# Allegro board FLASHLIGHT_REVA2-19.brd
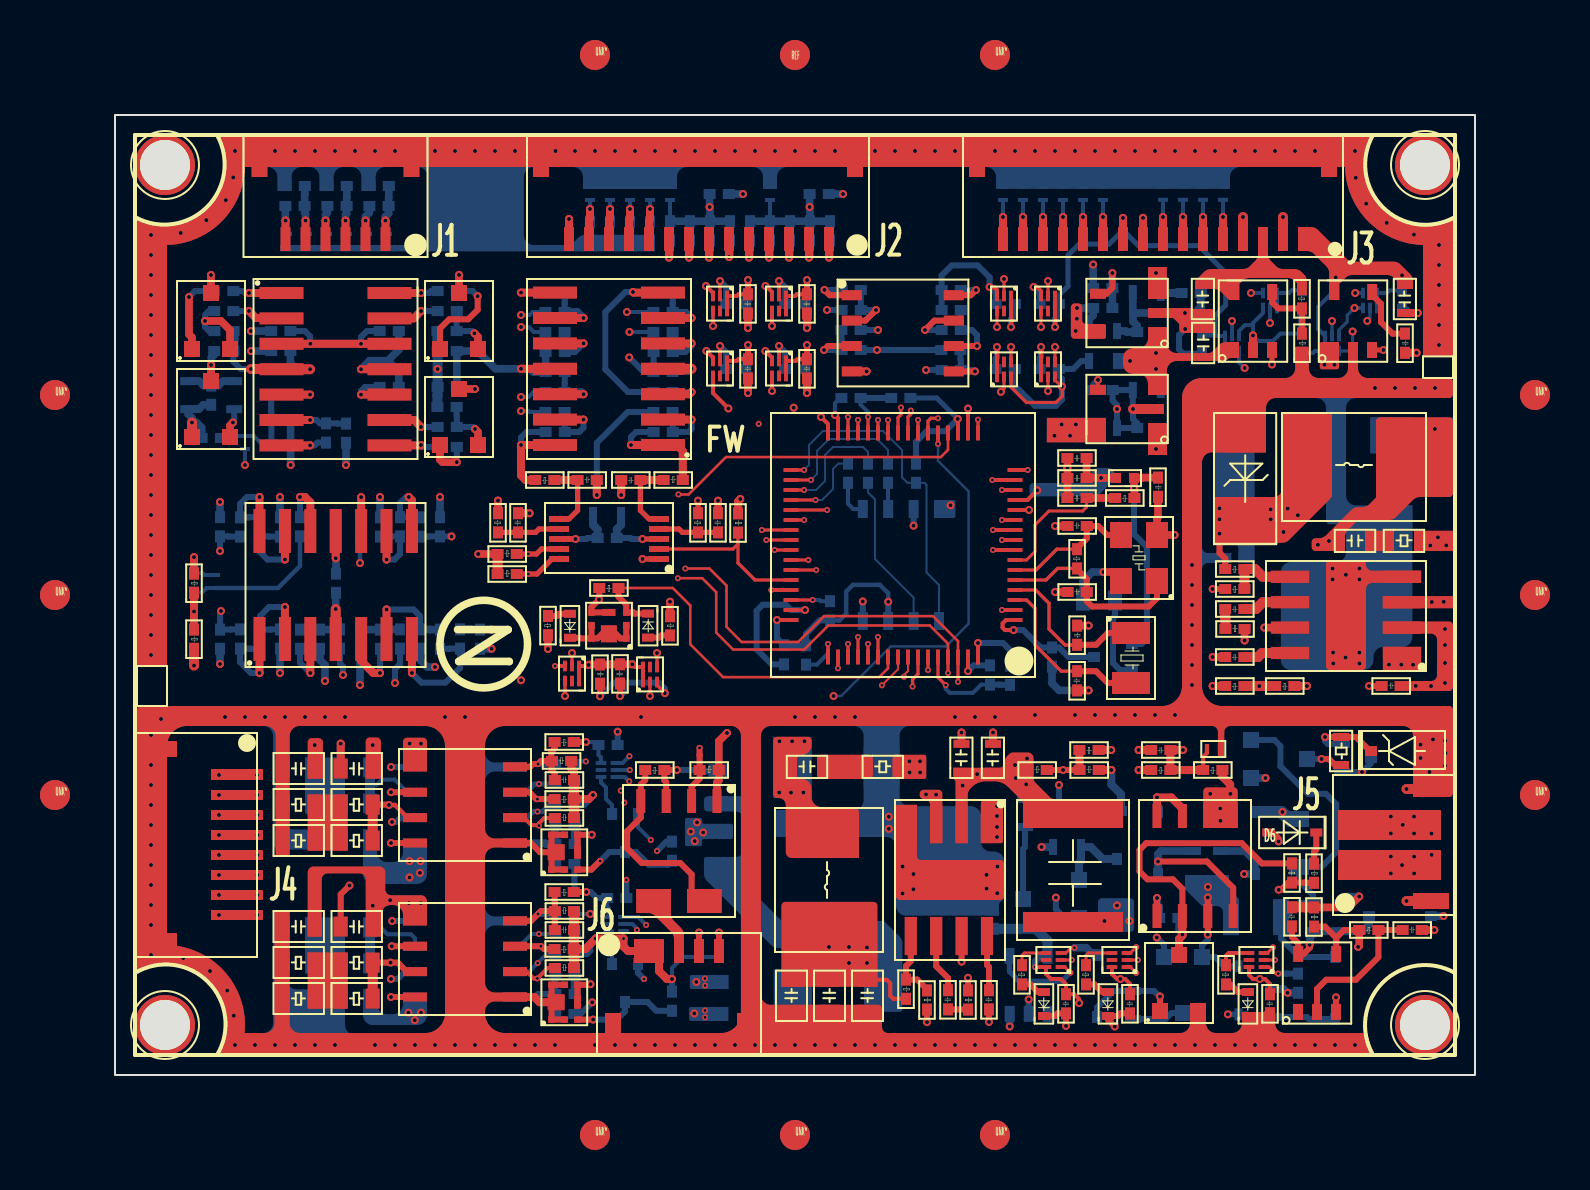
[diagram p0: board, top side]
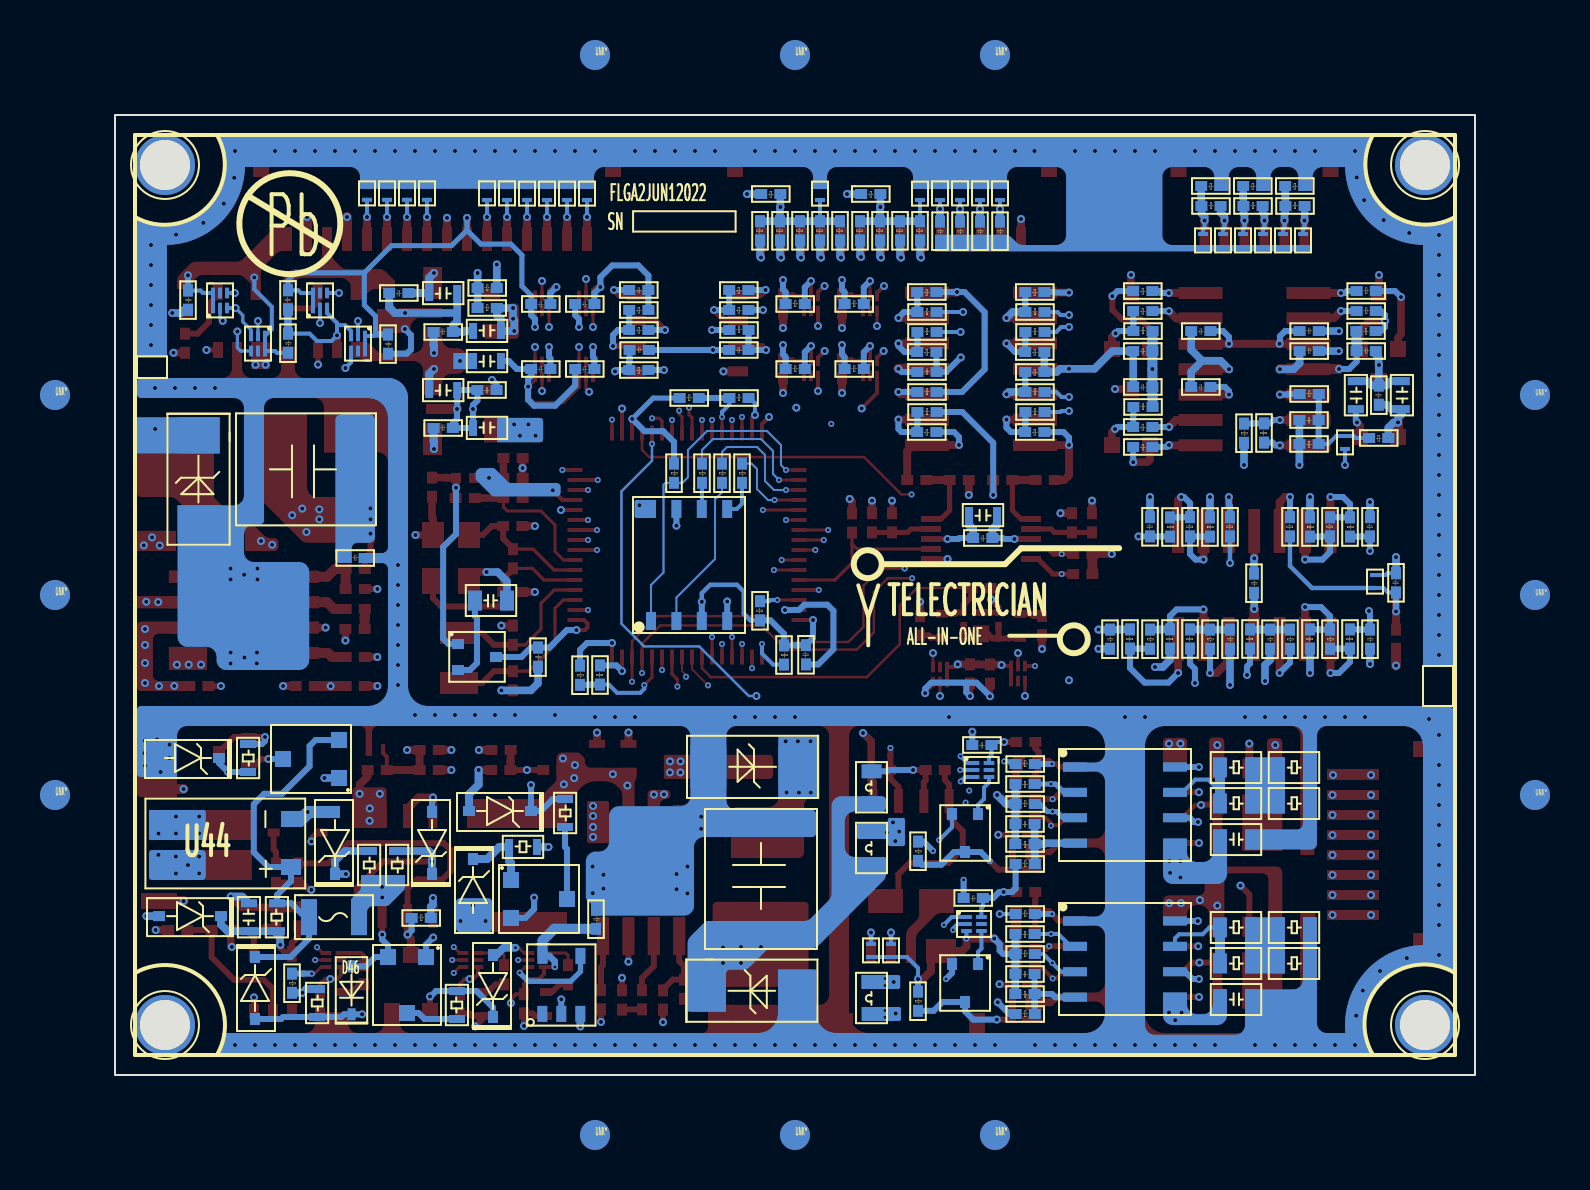
[diagram p1: board, bottom side, seen from below]

Outline 68 x 48 mm; copper layers: TOP, GND-2, SIGNAL-3, VCC-4, GND-5, SIGNAL-6, GND-7, BOTTOM. Coordinates in mm from the lower left corner of the outline.
Outline path: rectangle 0,0 68,48

## Design rules (mm)
constraint set DEFAULT: min track width 0.1

## Placement (name value [footprint] x y rotation side)
BT1  CR1220-3V  [C0805]  50.2 23.1 180 bottom
C1  10uF  [C0603]  54.8 38 90 top
C2  10uF  [C0603]  64.9 38 90 top
C3  0.1uF  [C0402]  31.4 39.05 270 top
C4  0.1uF  [C0402]  34.35 39.05 270 top
C5  4.7uF  [C0603]  54 37.4 270 top
C6  0.1uF  [C0402]  64.75 36.1 90 top
C7  0.1uF  [C0402]  31.4 35.8 270 top
C8  0.1uF  [C0402]  34.35 35.8 270 top
C9  10uF  [C0402]  47.61 30.6 0 top
C10  0.1uF  [C0402]  47.61 29.6 0 top
C11  0.1uF  [C0402]  24.1 30 180 top
C12  0.1uF  [C0402]  25.3 29.5 0 top
C13  0.1uF  [C0402]  52.4 28.9 90 top
C14  0.1uF  [C0402]  47.61 28.6 0 top
C15  0.1uF  [C0402]  19.9 28.1 270 top
C16  0.1uF  [C0402]  29.9 28.1 270 top
C17  22pF  [C0402]  48.6 27.7 180 top
C18  10nF  [C0603]  61.2 26.3 0 top
C19  22pF  [C0402]  48.6 24.4 180 top
C20  5.6nF  [C0402]  55.5 23.05 0 top
C21  22pF  [C0402]  48.35 21.5 90 top
C22  0.1uF  [C0402]  55.5 20.65 0 top
C23  0.1uF  [C0402]  24.5 19.55 90 top
C24  0.1uF  [C0402]  25 20.55 270 top
C25  22pF  [C0402]  47.85 20.2 270 top
C26  0.1uF  [C0402]  64.3 19.7 180 top
C27  0.1uF  [C0402]  51.8 16 0 top
C28  0.1uF  [C0603]  42.73 15.06 90 top
C29  0.1uF  [C0603]  44.3 15.06 90 top
C30  10nF  [C0603]  33.8 15 0 top
C31  10uF  [C0805]  8.19 14.7 0 top
C32  10uF  [C0805]  11.09 14.7 0 top
C33  0.1uF  [C0402]  22.96 15 180 top
C34  47uF  [C2220]  47.9 7.65 90 top
C35  0.1uF  [C0402]  58.6 8.4 270 top
C36  10uF  [C0805]  8.19 6.8 0 top
C37  10uF  [C0805]  11.09 6.8 0 top
C38  0.1uF  [C0402]  22.96 7.5 180 top
C39  1.5uF  [C0402]  65.35 7.5 180 top
C40  10uF  [C0805]  33.2 4.96 270 top
C41  10uF  [C0805]  35.1 4.96 270 top
C42  10uF  [C0805]  37 4.96 270 top
C43  5.6nF  [C0402]  41.4 4.25 270 top
C44  0.1uF  [C0402]  43.45 4.25 270 top
C45  0.1uF  [C0402]  47.3 4.05 270 top
C46  0.1uF  [C0402]  50.5 4.05 270 top
C47  0.1uF  [C0402]  57.5 4.05 270 top
C48  0.1uF  [C0402]  26.5 41.7 90 bottom
C49  0.1uF  [C0402]  25.5 41.7 90 bottom
C50  0.1uF  [C0402]  24.5 41.7 90 bottom
C51  0.1uF  [C0402]  23.5 41.7 90 bottom
C52  0.1uF  [C0402]  42.3 39 180 bottom
C53  0.1uF  [C0402]  54.3 38.85 180 bottom
C54  4.7uF  [C0603]  50.79 39.5 0 bottom
C55  0.1uF  [C0402]  64.1 38.26 90 bottom
C56  0.1uF  [C0402]  59.6 39.24 270 bottom
C57  0.1uF  [C0402]  47.2 38.3 180 bottom
C58  0.1uF  [C0402]  45 38.3 180 bottom
C59  10uF  [C0603]  50.2 36.8 180 bottom
C60  0.1uF  [C0402]  14.2 36.95 180 bottom
C61  0.1uF  [C0402]  7.8 37.45 0 bottom
C62  0.1uF  [C0402]  51.1 37.4 0 bottom
C63  0.1uF  [C0402]  59.1 36.1 90 bottom
C64  0.1uF  [C0402]  54.1 36.05 90 bottom
C65  0.1uF  [C0402]  41.3 36.5 0 bottom
C66  0.1uF  [C0402]  37.3 36 180 bottom
C67  10uF  [C0402]  17.1 35.95 180 bottom
C68  0.1uF  [C0402]  7.8 36.45 0 bottom
C69  10uF  [C0402]  4.95 36.45 0 bottom
C70  4.7uF  [C0603]  48.6 36.1 0 bottom
C71  0.1uF  [C0402]  47.2 35.05 180 bottom
C72  0.1uF  [C0402]  45 35.05 180 bottom
C73  0.1uF  [C0402]  26.91 35.4 0 bottom
C74  10uF  [C0402]  17.1 34.15 180 bottom
C75  0.1uF  [C0402]  14.2 34.15 180 bottom
C76  4.7uF  [C0603]  50.79 34.65 0 bottom
C77  0.1uF  [C0402]  49.89 34 180 bottom
C78  10uF  [C0603]  6.36 34.79 270 bottom
C79  0.1uF  [C0402]  5.06 34.48 270 bottom
C80  10uF  [C0603]  4.06 34.79 270 bottom
C81  0.1uF  [C0402]  8.79 32.5 180 bottom
C82  0.1uF  [C0402]  51.1 32.6 0 bottom
C83  10uF  [C0603]  50.2 31.95 180 bottom
C84  47uF  [C2220]  61.05 30.29 180 bottom
C85  10uF  [C0603]  23.8 28.4 0 bottom
C86  0.1uF  [C0402]  16.5 27.9 270 bottom
C87  0.1uF  [C0402]  5.5 27.9 270 bottom
C88  0.1uF  [C0402]  25.1 26.6 180 bottom
C89  0.1uF  [C0402]  55.5 26.1 0 bottom
C90  0.1uF  [C0402]  4.2 25.1 270 bottom
C91  0.1uF  [C0402]  10.8 24.1 90 bottom
C92  0.1uF  [C0402]  18 21.3 90 bottom
C93  0.1uF  [C0402]  12 21.3 90 bottom
C94  0.1uF  [C0402]  10 21.3 90 bottom
C95  0.1uF  [C0402]  5 21.3 90 bottom
C96  0.1uF  [C0402]  33.7 21.5 270 bottom
C97  0.1uF  [C0402]  46.6 20.41 90 bottom
C98  0.1uF  [C0402]  25.14 16.25 180 bottom
C99  0.1uF  [C0402]  22.99 12.3 180 bottom
C100  10uF  [C0805]  10.95 12.4 0 bottom
C101  47uF  [C2220]  35.7 12.4 270 bottom
C102  0.1uF  [C0402]  25.58 8.6 180 bottom
C103  10uF  [C0603]  60.9 7.09 90 bottom
C104  0.1uF  [C0402]  43.7 7.3 90 bottom
C105  0.1uF  [C0402]  22.99 4.8 180 bottom
C106  10uF  [C0805]  10.95 4.4 0 bottom
D1  SMAJ6.0A  [DO-214AC]  57.9 27.5 90 top
D2  BLUE  [LED0402]  23 21.96 90 top
D3  BLUE  [LED0402]  26.4 22.97 270 top
D4  ESD4.5V88D-C  [DFN-1006DN]  55.24 16.3 180 top
D5  BZT52C6V8  [SOD-123]  62.8 16.2 0 top
D6  MBRX0560  [SOD-323]  60.3 12.8 180 top
D7  BLUE  [LED0402]  46.7 3.05 90 top
D8  RED  [LED0402]  49.9 3.05 90 top
D9  YELLOW  [LED0402]  56.9 3.05 90 top
D10  ESD4.5V88D-C  [DFN-1006DN]  49.4 43.75 90 bottom
D11  ESD4.5V88D-C  [DFN-1006DN]  48.4 43.75 90 bottom
D12  ESD4.5V88D-C  [DFN-1006DN]  26.75 43.75 90 bottom
D13  ESD4.5V88D-C  [DFN-1006DN]  25.75 43.75 90 bottom
D14  ESD4.5V88D-C  [DFN-1006DN]  24.75 43.75 90 bottom
D15  ESD4.5V88D-C  [DFN-1006DN]  23.75 43.75 90 bottom
D16  ESD4.5V88D-C  [DFN-1006DN]  55.4 44.41 270 bottom
D17  ESD4.5V88D-C  [DFN-1006DN]  54.4 44.41 270 bottom
D18  ESD4.5V88D-C  [DFN-1006DN]  53.4 44.41 270 bottom
D19  ESD4.5V88D-C  [DFN-1006DN]  52.4 44.41 270 bottom
D20  ESD4.5V88D-C  [DFN-1006DN]  47.4 44.4 270 bottom
D21  ESD4.5V88D-C  [DFN-1006DN]  46.4 44.4 270 bottom
D22  ESD4.5V88D-C  [DFN-1006DN]  45.4 44.4 270 bottom
D23  ESD4.5V88D-C  [DFN-1006DN]  44.4 44.4 270 bottom
D24  ESD4.5V88D-C  [DFN-1006DN]  32.75 44.4 270 bottom
D25  ESD4.5V88D-C  [DFN-1006DN]  27.75 44.4 270 bottom
D26  ESD4.5V88D-C  [DFN-1006DN]  13.6 41.4 90 bottom
D27  ESD4.5V88D-C  [DFN-1006DN]  12.6 41.4 90 bottom
D28  ESD4.5V88D-C  [DFN-1006DN]  11.6 41.4 90 bottom
D29  ESD4.5V88D-C  [DFN-1006DN]  10.6 41.4 90 bottom
D30  ESD4.5V88D-C  [DFN-1006DN]  9.6 41.4 90 bottom
D31  ESD4.5V88D-C  [DFN-1006DN]  8.6 41.4 90 bottom
D32  ESD4.5V88D-C  [DFN-1006DN]  6.5 31.3 90 bottom
D33  SS35  [DO-214AC]  65.22 32.11 270 bottom
D34  ESD4.5V88D-C  [DFN-1006DN]  5 25 270 bottom
D35  BZT52C4V7  [SOD-123]  62.8 15.85 0 bottom
D36  SS35  [DO-214AC]  33.8 16.8 0 bottom
D37  BZT52C4V7  [SOD-123]  47.2 13.2 0 bottom
D38  BZT52C36V  [SOD-123]  57 10.05 90 bottom
D39  BZT52C24  [SOD-123]  52.15 10.05 90 bottom
D40  BZT52C24  [SOD-123]  50.1 10.8 270 bottom
D41  BZT52C4V7  [SOD-123]  62.7 7.95 0 bottom
D42  ESD4.5V88D-C  [DFN-1006DN]  30.2 5.9 90 bottom
D43  ESD4.5V88D-C  [DFN-1006DN]  29.2 5.9 90 bottom
D44  BZT52C4V7  [SOD-123]  49.1 2.9 90 bottom
D45  BZT52C4V7  [SOD-123]  61 5.9 270 bottom
D46  MBRX0560  [SOD-323]  55.5 2.8 90 bottom
D47  SMAJ13A  [DO-214AC]  38.48 2.82 180 bottom
F1  1AMP  [FUSE1206]  58.3 7.9 180 bottom
J1  Header1x6  [SMD-SH1D0-6P-HOR]  11.03 42.5 180 top
J2  Header1x14  [SMD-SH1D0-14P-HOR]  28.2 42.5 180 top
J3  Header1x16  [SMD-SH1D0-16P-HOR]  51.9 42.5 180 top
J4  Header1x8  [SMD-SH1D0-8P-HOR]  5.5 11.5 270 top
J5  Header1x4  [SMD-SH1D0-4P-HOR]  62.5 11.5 90 top
J6  Header1x5  [SMD-SH1D0-5P-HOR]  28.7 5.5 0 top
L1  10uH  [IND-5D7X5D2X1D8]  64.05 30.4 180 top
L2  BLM15BD182SN1D  [FB0402]  51 30.09 180 top
L3  10uH  [IND-5D7X5D2X1D8]  35.7 11.85 270 top
L4  1uH  [L0805]  29.55 13.39 90 bottom
L5  1uH  [L0805]  29.55 10.35 90 bottom
L6  1uH  [L0805]  29.55 2.85 90 bottom
NOREF  -  []  59.88 3.58 90 top
NOREF#2  -  []  20.27 24.88 0 top
NOREF#3  -  []  62.5 27.5 90 top
NOREF#4  -  []  45.6 5.03 0 top
NOREF#5  -  []  31.1 42.23 90 top
NOREF#6  -  []  23.16 11.16 0 top
NOREF#7  -  []  47.24 6.1 0 top
NOREF#8  -  []  22.15 24.88 90 top
NOREF#9  -  []  24.55 31.76 90 top
NOREF#10  -  []  4.5 35.03 0 top
NOREF#11  -  []  62.5 7.09 90 top
NOREF#12  -  []  39.19 15 90 top
NOREF#13  -  []  69.82 32.11 90 top
NOREF#14  -  []  50.79 40.31 0 top
NOREF#15  -  []  15.66 32.23 0 top
NOREF#16  -  []  11.09 4.45 0 top
NOREF#17  -  []  65.25 26.3 90 top
NOREF#18  -  []  23.4 13.41 90 top
NOREF#19  -  []  50.65 35.98 0 top
NOREF#20  -  []  13.72 21.82 0 top
NOREF#21  -  []  25.01 7.03 90 top
NOREF#22  -  []  50.33 37.18 90 top
NOREF#23  -  []  39 4.96 90 top
NOREF#24  -  []  13.09 5 90 top
NOREF#25  -  []  55.05 19.06 0 top
NOREF#26  -  []  47.8 3.58 0 top
NOREF#27  -  []  7.35 32.88 0 top
NOREF#28  -  []  23.78 22.49 90 top
NOREF#29  -  []  45.9 14.71 0 top
NOREF#30  -  []  12.95 12.4 90 top
NOREF#31  -  []  66.48 37.16 90 top
NOREF#32  -  []  27.22 42.23 0 top
NOREF#33  -  []  26.15 28.58 90 top
NOREF#34  -  []  20.55 29.36 0 top
NOREF#35  -  []  10.84 31.16 90 top
NOREF#36  -  []  13.65 44.06 90 top
NOREF#37  -  []  52.39 39.5 90 top
NOREF#38  -  []  17.54 36.03 90 top
NOREF#39  -  []  61.2 27.11 0 top
NOREF#40  -  []  27.88 40.61 90 top
NOREF#41  -  []  8.19 14.15 0 top
NOREF#42  -  []  40.23 32.68 90 top
NOREF#43  -  []  21.52 13.41 0 top
NOREF#44  -  []  29.55 11.6 0 top
NOREF#45  -  []  47.5 13.9 90 top
NOREF#46  -  []  5.72 21.82 0 top
NOREF#47  -  []  8.72 27.43 0 top
NOREF#48  -  []  23.4 5.91 90 top
NOREF#49  -  []  26.46 31.98 0 top
NOREF#50  -  []  10.19 12.9 90 top
NOREF#51  -  []  50.68 5.03 90 top
NOREF#52  -  []  27.2 16.11 90 top
NOREF#53  -  []  4.28 34.01 0 top
NOREF#54  -  []  8.06 42.28 0 top
NOREF#55  -  []  32.92 21.03 0 top
NOREF#56  -  []  22.94 36.98 90 top
NOREF#57  -  []  56.48 34.97 90 top
NOREF#58  -  []  11.09 8.05 0 top
NOREF#59  -  []  37.74 36.08 90 top
NOREF#60  -  []  47.16 29.46 0 top
NOREF#61  -  []  43.95 3.78 0 top
NOREF#62  -  []  48.35 25.83 0 top
NOREF#63  -  []  53.63 6.68 90 top
NOREF#64  -  []  37.47 38.86 0 top
NOREF#65  -  []  28.07 35.76 0 top
NOREF#66  -  []  38.78 28.51 90 top
NOREF#67  -  []  16.5 20.21 0 top
NOREF#68  -  []  21.55 14.38 0 top
NOREF#69  -  []  28.34 31.98 90 top
NOREF#70  -  []  52.88 3.58 90 top
NOREF#71  -  []  34.8 19.42 0 top
NOREF#72  -  []  37.47 37.86 0 top
NOREF#73  -  []  35.1 42.23 90 top
NOREF#74  -  []  64.47 18.28 0 top
NOREF#75  -  []  17.27 34.01 0 top
NOREF#76  -  []  51.35 15.86 0 top
NOREF#77  -  []  56.93 19.06 90 top
NOREF#78  -  []  22.99 14.53 0 top
NOREF#79  -  []  25.04 3.66 90 top
NOREF#80  -  []  20.38 20.21 90 top
NOREF#81  -  []  17.27 32.01 0 top
NOREF#82  -  []  22.67 31.76 0 top
NOREF#83  -  []  55.9 11.3 90 top
NOREF#84  -  []  13.5 25.82 0 top
NOREF#85  -  []  3.42 20.21 0 top
NOREF#86  -  []  32.22 42.23 0 top
NOREF#87  -  []  5.3 23.01 90 top
NOREF#88  -  []  8.19 6.25 0 top
NOREF#89  -  []  51.75 6.68 0 top
NOREF#90  -  []  12.95 4.4 90 top
NOREF#91  -  []  48.45 37.18 0 top
NOREF#92  -  [unnamed#3]  2.5 45.5 0 top
NOREF#93  -  []  8.38 25.82 90 top
NOREF#94  -  []  60.35 39.3 0 top
NOREF#95  -  []  65.22 34.9 0 top
NOREF#96  -  []  30.1 34.13 0 top
NOREF#97  -  []  26.05 14.86 0 top
NOREF#98  -  []  7.72 21.82 0 top
NOREF#99  -  []  5.47 31.46 0 top
NOREF#100  -  []  25 40.61 0 top
NOREF#101  -  []  59.4 3.01 0 top
NOREF#102  -  []  45.1 20.02 90 top
NOREF#103  -  []  6.36 35.6 0 top
NOREF#104  -  []  29.4 27.63 0 top
NOREF#105  -  []  22.15 23.88 90 top
NOREF#106  -  []  10.02 32.12 0 top
NOREF#107  -  []  21.55 9.38 0 top
NOREF#108  -  []  37.47 35.86 0 top
NOREF#109  -  []  21.06 36.98 0 top
NOREF#110  -  []  25.64 23.96 90 top
NOREF#111  -  [unnamed#3]  65.5 45.5 0 top
NOREF#112  -  []  -5 53 0 top
NOREF#113  -  []  59.15 3.16 90 top
NOREF#114  -  []  58.82 38.77 0 top
NOREF#115  -  []  22.67 35.76 0 top
NOREF#116  -  []  49.45 20.41 90 top
NOREF#117  -  []  22.67 38.76 0 top
NOREF#118  -  []  26 40.61 0 top
NOREF#119  -  []  11.8 30.51 0 top
NOREF#120  -  []  33.2 6.21 0 top
NOREF#121  -  []  9.5 20.21 0 top
NOREF#122  -  []  17.27 31.01 0 top
NOREF#123  -  []  55.05 24.68 0 top
NOREF#124  -  []  44.35 37.86 90 top
NOREF#125  -  []  33.1 42.23 90 top
NOREF#126  -  []  48.4 11.81 0 top
NOREF#127  -  []  42.18 28.51 90 top
NOREF#128  -  []  12.5 20.21 0 top
NOREF#129  -  []  23.43 14.38 90 top
NOREF#130  -  []  31.9 38.58 0 top
NOREF#131  -  []  10.38 25.82 90 top
NOREF#132  -  []  48.98 19.32 90 top
NOREF#133  -  []  42.73 35.08 90 top
NOREF#134  -  []  13.09 11.1 90 top
NOREF#135  -  []  23.8 29.21 0 top
NOREF#136  -  []  12.04 42.28 90 top
NOREF#137  -  []  10.19 6.8 90 top
NOREF#138  -  []  4.06 35.6 0 top
NOREF#139  -  []  59.9 4.4 90 top
NOREF#140  -  []  19.4 27.63 0 top
NOREF#141  -  []  56.66 21.13 0 top
NOREF#142  -  []  49.68 3.58 90 top
NOREF#143  -  []  27 40.61 0 top
NOREF#144  -  []  57.3 11.3 90 top
NOREF#145  -  []  58 3.58 0 top
NOREF#146  -  []  10.72 21.82 0 top
NOREF#147  -  []  28.88 40.61 90 top
NOREF#148  -  []  59.43 19.06 90 top
NOREF#149  -  []  25.04 6.66 90 top
NOREF#150  -  []  38.35 32.68 0 top
NOREF#151  -  []  14.38 20.21 90 top
NOREF#152  -  []  27.22 20.88 0 top
NOREF#153  -  []  59.42 6.32 0 top
NOREF#154  -  []  9.94 42.28 90 top
NOREF#155  -  [unnamed#3]  2.5 2.5 0 top
NOREF#156  -  []  23.4 8.76 90 top
NOREF#157  -  []  5.5 20.21 0 top
NOREF#158  -  []  42.73 15.87 0 top
NOREF#159  -  []  50.65 22.98 90 top
NOREF#160  -  []  35.86 32.68 0 top
NOREF#161  -  []  49.25 38.16 90 top
NOREF#162  -  []  14.37 36.81 0 top
NOREF#163  -  []  63.97 35.01 0 top
NOREF#164  -  []  44.35 36.86 90 top
NOREF#165  -  []  27.38 20.07 90 top
NOREF#166  -  []  53.23 14.86 90 top
NOREF#167  -  []  31.28 27.63 90 top
NOREF#168  -  []  67.4 6.08 90 top
NOREF#169  -  []  36.9 28.51 0 top
NOREF#170  -  []  50.5 3.51 0 top
NOREF#171  -  []  64.9 38.81 0 top
NOREF#172  -  []  40.3 28.51 0 top
NOREF#173  -  []  45.9 15.06 90 top
NOREF#174  -  []  35.22 42.23 0 top
NOREF#175  -  []  58.55 6.2 0 top
NOREF#176  -  []  55.35 39.3 0 top
NOREF#177  -  []  61.48 38.83 90 top
NOREF#178  -  []  12.95 16 90 top
NOREF#179  -  []  10.95 13.65 0 top
NOREF#180  -  []  60.9 7.9 0 top
NOREF#181  -  []  21.55 6.88 0 top
NOREF#182  -  []  25.32 16.11 0 top
NOREF#183  -  []  24.87 14.53 90 top
NOREF#184  -  []  57.55 19.06 0 top
NOREF#185  -  []  6.72 27.43 0 top
NOREF#186  -  []  59.1 10.12 0 top
NOREF#187  -  []  3.42 24.63 0 top
NOREF#188  -  []  54 38.21 0 top
NOREF#189  -  []  13.09 14.7 90 top
NOREF#190  -  []  55.3 31.75 90 top
NOREF#191  -  []  52.39 34.65 90 top
NOREF#192  -  []  7.6 21.82 90 top
NOREF#193  -  []  10.19 3.2 90 top
NOREF#194  -  []  20.4 27.63 0 top
NOREF#195  -  []  40.9 2.71 90 top
NOREF#196  -  []  25.04 14.16 90 top
NOREF#197  -  []  25.75 8.46 0 top
NOREF#198  -  []  10.6 27.43 90 top
NOREF#199  -  []  30.1 37.38 0 top
NOREF#200  -  []  51 3.58 0 top
NOREF#201  -  []  10.05 6.2 90 top
NOREF#202  -  []  37 6.21 0 top
NOREF#203  -  [unnamed#3]  65.5 2.5 0 top
NOREF#204  -  []  26.73 29.36 90 top
NOREF#205  -  []  13.72 27.43 0 top
NOREF#206  -  []  31.55 13.39 90 top
NOREF#207  -  []  55.7 12.11 0 top
NOREF#208  -  []  28.57 28.58 0 top
NOREF#209  -  []  42.47 34.86 0 top
NOREF#210  -  []  30.4 27.63 0 top
NOREF#211  -  []  38.4 16.8 90 top
NOREF#212  -  []  41.95 2.17 90 top
NOREF#213  -  []  35.2 4.96 90 top
NOREF#214  -  []  46.08 6.21 90 top
NOREF#215  -  []  46.77 14.08 0 top
NOREF#216  -  []  23.16 6.66 0 top
NOREF#217  -  []  13.87 44.06 0 top
NOREF#218  -  []  32.75 43.66 90 top
NOREF#219  -  []  26.46 33.98 0 top
NOREF#220  -  []  32.1 42.23 90 top
NOREF#221  -  []  29.1 42.23 90 top
NOREF#222  -  []  30.1 42.23 90 top
NOREF#223  -  []  25.01 11.68 90 top
NOREF#224  -  []  62.5 17 90 top
NOREF#225  -  []  44.35 34.86 90 top
NOREF#226  -  []  55.95 36.25 0 top
NOREF#227  -  []  23.13 13.58 0 top
NOREF#228  -  []  47.16 30.46 0 top
NOREF#229  -  []  23.13 4.18 0 top
NOREF#230  -  []  53.95 14.86 0 top
NOREF#231  -  []  10.95 15.45 0 top
NOREF#232  -  []  35.1 6.21 0 top
NOREF#233  -  []  4.5 38.03 0 top
NOREF#234  -  []  17.38 25.82 90 top
NOREF#235  -  []  37.1 23.23 90 top
NOREF#236  -  []  59.1 7.93 0 top
NOREF#237  -  []  37.59 15.81 0 top
NOREF#238  -  []  50.65 26.28 90 top
NOREF#239  -  []  41.3 39.6 90 top
NOREF#240  -  []  28.07 38.76 0 top
NOREF#241  -  []  8.19 15.95 0 top
NOREF#242  -  []  9.23 32.88 90 top
NOREF#243  -  []  57.9 30.29 0 top
NOREF#244  -  []  23.16 14.16 0 top
NOREF#245  -  []  49.04 30.46 90 top
NOREF#246  -  []  41.9 3.78 0 top
NOREF#247  -  []  50.2 24.35 0 top
NOREF#248  -  []  7.38 20.21 90 top
NOREF#249  -  []  19.15 35.81 90 top
NOREF#250  -  []  24 40.61 0 top
NOREF#251  -  []  36.3 45.8 0 top
NOREF#252  -  []  55.05 24.91 0 top
NOREF#253  -  []  52.1 2.7 90 top
NOREF#254  -  []  11.09 6.25 0 top
NOREF#255  -  []  11.55 44.06 90 top
NOREF#256  -  []  21.06 32.98 0 top
NOREF#257  -  []  52.53 35.98 90 top
NOREF#258  -  []  10.16 42.28 0 top
NOREF#259  -  []  50.2 37.61 0 top
NOREF#260  -  []  21.06 35.98 0 top
NOREF#261  -  []  23.4 16.26 90 top
NOREF#262  -  []  56.93 24.68 90 top
NOREF#263  -  []  44.3 15.87 0 top
NOREF#264  -  []  15.38 25.82 90 top
NOREF#265  -  []  31.22 42.23 0 top
NOREF#266  -  []  7.5 20.21 0 top
NOREF#267  -  []  51.62 27.81 0 top
NOREF#268  -  []  27.15 26.46 90 top
NOREF#269  -  []  30.45 28.58 90 top
NOREF#270  -  []  29.22 42.23 0 top
NOREF#271  -  []  60.7 38.77 90 top
NOREF#272  -  []  10.95 17.25 0 top
NOREF#273  -  []  36.73 38.58 90 top
NOREF#274  -  []  56.93 24.91 90 top
NOREF#275  -  []  16.72 21.82 0 top
NOREF#276  -  []  6.6 27.43 90 top
NOREF#277  -  []  10.95 9.25 0 top
NOREF#278  -  []  42.47 37.86 0 top
NOREF#279  -  []  17.27 35.81 0 top
NOREF#280  -  []  31.55 10.35 90 top
NOREF#281  -  []  59.42 8.51 0 top
NOREF#282  -  []  14.14 42.28 90 top
NOREF#283  -  []  48.77 22.98 0 top
NOREF#284  -  []  59.6 38.83 0 top
NOREF#285  -  []  49.25 34.91 90 top
NOREF#286  -  []  54.6 34.97 0 top
NOREF#287  -  []  33.05 34.13 0 top
NOREF#288  -  []  47.58 20.41 0 top
NOREF#289  -  []  25.04 11.16 90 top
NOREF#290  -  []  8.05 7.45 0 top
NOREF#291  -  []  30.37 14.08 0 top
NOREF#292  -  []  42.47 38.86 0 top
NOREF#293  -  []  13.09 6.8 90 top
NOREF#294  -  []  50.2 36.1 90 top
NOREF#295  -  []  21.06 31.98 0 top
NOREF#296  -  []  13.5 20.21 0 top
NOREF#297  -  []  28.34 33.98 90 top
NOREF#298  -  []  19.15 32.01 90 top
NOREF#299  -  []  50.34 2.91 90 top
NOREF#300  -  []  11.9 32.12 90 top
NOREF#301  -  []  25.27 26.46 0 top
NOREF#302  -  []  44.35 38.86 90 top
NOREF#303  -  []  22.43 29.36 90 top
NOREF#304  -  []  15.75 44.06 90 top
NOREF#305  -  []  59.6 35.01 0 top
NOREF#306  -  []  61.1 7.09 90 top
NOREF#307  -  []  58.3 5.21 0 top
NOREF#308  -  []  37.74 32.68 90 top
NOREF#309  -  []  6.5 25.82 0 top
NOREF#310  -  []  40.07 2.17 0 top
NOREF#311  -  []  4.72 27.43 0 top
NOREF#312  -  []  3.42 23.01 0 top
NOREF#313  -  []  65.85 35.01 90 top
NOREF#314  -  []  55.95 36.25 90 top
NOREF#315  -  []  43.78 3.78 90 top
NOREF#316  -  []  47.16 28.46 0 top
NOREF#317  -  []  58.45 36.1 90 top
NOREF#318  -  []  33.8 19.59 0 top
NOREF#319  -  []  7.35 31.46 90 top
NOREF#320  -  []  6.38 38.03 90 top
NOREF#321  -  []  51.94 33.86 90 top
NOREF#322  -  []  39.78 28.51 90 top
NOREF#323  -  []  22.94 35.98 90 top
NOREF#324  -  []  9.23 36.03 90 top
NOREF#325  -  []  26.88 40.61 90 top
NOREF#326  -  []  25.04 4.66 90 top
NOREF#327  -  []  66.35 18.28 90 top
NOREF#328  -  []  56.93 20.51 90 top
NOREF#329  -  []  28.07 31.76 0 top
NOREF#330  -  []  55.3 36.55 90 top
NOREF#331  -  []  56.93 22.91 90 top
NOREF#332  -  []  16.25 34.01 90 top
NOREF#333  -  []  50.23 19.73 90 top
NOREF#334  -  []  51.8 36.8 90 top
NOREF#335  -  []  9.23 35.03 90 top
NOREF#336  -  []  10.19 14.7 90 top
NOREF#337  -  []  28.34 36.98 90 top
NOREF#338  -  []  34.85 38.58 0 top
NOREF#339  -  []  34.22 42.23 0 top
NOREF#340  -  []  19.15 38.81 90 top
NOREF#341  -  []  11.3 23.01 0 top
NOREF#342  -  []  55.6 37.4 90 top
NOREF#343  -  []  11.09 14.15 0 top
NOREF#344  -  []  48.65 14.08 90 top
NOREF#345  -  []  45.17 34.91 0 top
NOREF#346  -  []  49.37 14.08 0 top
NOREF#347  -  []  57.68 5.03 90 top
NOREF#348  -  []  12.26 42.28 0 top
NOREF#349  -  []  34.1 42.23 90 top
NOREF#350  -  []  46.88 18.41 90 top
NOREF#351  -  []  48.8 5.03 0 top
NOREF#352  -  []  35.86 36.08 0 top
NOREF#353  -  []  47.48 5.03 90 top
NOREF#354  -  []  48.35 19.73 0 top
NOREF#355  -  []  15.72 27.43 0 top
NOREF#356  -  []  33.05 37.38 0 top
NOREF#357  -  []  45.17 38.16 0 top
NOREF#358  -  []  10.05 16 90 top
NOREF#359  -  []  -5 -5 90 top
NOREF#360  -  []  6.38 35.03 90 top
NOREF#361  -  []  0 24 0 top
NOREF#362  -  []  15.6 21.82 90 top
NOREF#363  -  []  23.43 12.38 90 top
NOREF#364  -  []  6.11 36.81 0 top
NOREF#365  -  []  56.35 38.71 90 top
NOREF#366  -  []  15.6 27.43 90 top
NOREF#367  -  []  8.96 32.36 0 top
NOREF#368  -  []  26.46 32.98 0 top
NOREF#369  -  []  37.9 28.51 0 top
NOREF#370  -  []  39.35 38.86 90 top
NOREF#371  -  []  18.38 20.21 90 top
NOREF#372  -  []  8.19 12.35 0 top
NOREF#373  -  []  31.9 35.33 0 top
NOREF#374  -  []  23.16 3.66 0 top
NOREF#375  -  []  45.83 3.78 90 top
NOREF#376  -  []  47.05 34.91 90 top
NOREF#377  -  []  36.68 19.42 90 top
NOREF#378  -  []  4.5 37.03 0 top
NOREF#379  -  []  28.1 2.11 0 top
NOREF#380  -  []  40.78 28.51 90 top
NOREF#381  -  []  21.52 8.76 0 top
NOREF#382  -  []  14.72 21.82 0 top
NOREF#383  -  []  60.95 36.25 0 top
NOREF#384  -  []  52.53 31.18 90 top
NOREF#385  -  []  59.15 3.16 0 top
NOREF#386  -  []  48.6 36.91 0 top
NOREF#387  -  []  22.67 34.76 0 top
NOREF#388  -  []  38.48 5.61 0 top
NOREF#389  -  []  49.55 28.46 0 top
NOREF#390  -  []  17.54 32.23 90 top
NOREF#391  -  []  49.04 28.46 90 top
NOREF#392  -  []  32.5 26.02 90 top
NOREF#393  -  []  53.23 15.86 90 top
NOREF#394  -  []  35.22 23.23 0 top
NOREF#395  -  []  8.19 8.05 0 top
NOREF#396  -  []  8.19 4.45 0 top
NOREF#397  -  []  33.22 42.23 0 top
NOREF#398  -  []  61.75 6.86 0 top
NOREF#399  -  []  10.5 20.21 0 top
NOREF#400  -  []  28.34 32.98 90 top
NOREF#401  -  []  52.05 32.35 90 top
NOREF#402  -  []  63.35 16.65 90 top
NOREF#403  -  []  13.09 12.9 90 top
NOREF#404  -  []  26.46 36.98 0 top
NOREF#405  -  []  15.5 25.82 0 top
NOREF#406  -  []  47.76 15.86 0 top
NOREF#407  -  []  61.65 3.01 90 top
NOREF#408  -  []  52.05 32.35 90 top
NOREF#409  -  []  19.15 37.81 90 top
NOREF#410  -  []  38.9 28.51 0 top
NOREF#411  -  []  29.95 31.76 90 top
NOREF#412  -  []  50.33 38.18 90 top
NOREF#413  -  []  21.52 5.91 0 top
NOREF#414  -  []  49.04 29.46 90 top
NOREF#415  -  []  21.55 4.88 0 top
NOREF#416  -  []  55.05 22.91 0 top
NOREF#417  -  []  12.95 14.2 90 top
NOREF#418  -  []  36.73 35.33 90 top
NOREF#419  -  []  55.05 23.91 0 top
NOREF#420  -  []  12.38 20.21 90 top
NOREF#421  -  []  24.55 34.76 90 top
NOREF#422  -  []  14.37 34.01 0 top
NOREF#423  -  []  31.98 37.38 90 top
NOREF#424  -  []  6.16 34.01 90 top
NOREF#425  -  []  43.22 20.02 0 top
NOREF#426  -  []  62.8 26.3 90 top
NOREF#427  -  []  23.13 6.08 0 top
NOREF#428  -  []  63.63 6.86 90 top
NOREF#429  -  []  21.55 12.38 0 top
NOREF#430  -  []  17.27 38.81 0 top
NOREF#431  -  []  19.15 31.01 90 top
NOREF#432  -  []  18.5 20.21 0 top
NOREF#433  -  []  24.55 38.76 90 top
NOREF#434  -  []  28.34 35.98 90 top
NOREF#435  -  []  11.72 27.43 0 top
NOREF#436  -  []  7.35 35.03 0 top
NOREF#437  -  []  32.28 27.63 90 top
NOREF#438  -  []  34.93 34.13 90 top
NOREF#439  -  []  15.38 20.21 90 top
NOREF#440  -  []  47.05 38.16 90 top
NOREF#441  -  []  25.88 40.61 90 top
NOREF#442  -  []  50.79 35.46 0 top
NOREF#443  -  []  47.37 34.91 0 top
NOREF#444  -  []  5.66 34.79 90 top
NOREF#445  -  []  23.13 7.03 0 top
NOREF#446  -  []  54.47 38.71 0 top
NOREF#447  -  []  18.6 21.82 90 top
NOREF#448  -  []  43.08 2.82 90 top
NOREF#449  -  []  10.84 32.36 90 top
NOREF#450  -  []  23.43 4.88 90 top
NOREF#451  -  []  42.47 36.86 0 top
NOREF#452  -  []  32.25 14.08 90 top
NOREF#453  -  []  8.6 27.43 90 top
NOREF#454  -  []  58.82 35.01 0 top
NOREF#455  -  []  16.25 36.81 90 top
NOREF#456  -  []  25.01 4.18 90 top
NOREF#457  -  []  23.16 4.66 0 top
NOREF#458  -  []  39.35 37.86 90 top
NOREF#459  -  []  23.72 18.46 0 top
NOREF#460  -  []  26.46 35.98 0 top
NOREF#461  -  []  37.1 4.96 90 top
NOREF#462  -  []  34.93 37.38 90 top
NOREF#463  -  []  30.87 43.66 0 top
NOREF#464  -  []  52.05 37.15 90 top
NOREF#465  -  []  30.62 26.02 0 top
NOREF#466  -  []  49.64 15.86 90 top
NOREF#467  -  []  24.85 29.36 0 top
NOREF#468  -  []  29.95 38.76 90 top
NOREF#469  -  []  37.75 43.66 90 top
NOREF#470  -  []  50 11 90 top
NOREF#471  -  []  45.69 3.05 0 top
NOREF#472  -  []  44.2 6.21 0 top
NOREF#473  -  []  29.98 9.61 90 top
NOREF#474  -  []  30.22 42.23 0 top
NOREF#475  -  []  66.5 38 90 top
NOREF#476  -  []  61.28 3.01 90 top
NOREF#477  -  []  61.3 8.51 90 top
NOREF#478  -  []  11.09 12.35 0 top
NOREF#479  -  []  13.68 30.51 90 top
NOREF#480  -  []  8.05 9.25 0 top
NOREF#481  -  []  51.8 31.95 90 top
NOREF#482  -  []  63.45 36.1 90 top
NOREF#483  -  []  16.6 21.82 90 top
NOREF#484  -  []  50.06 33.86 0 top
NOREF#485  -  []  29.55 4.1 0 top
NOREF#486  -  []  34.8 21.03 90 top
NOREF#487  -  []  55.8 5.03 0 top
NOREF#488  -  []  36.1 42.23 90 top
NOREF#489  -  []  52.2 23.1 90 top
NOREF#490  -  []  33.78 38.58 90 top
NOREF#491  -  []  61.48 35.01 90 top
NOREF#492  -  []  60.98 10.12 90 top
NOREF#493  -  []  52.2 34.95 0 top
NOREF#494  -  []  27.93 14.86 90 top
NOREF#495  -  []  60.98 7.93 90 top
NOREF#496  -  []  23.43 6.88 90 top
NOREF#497  -  []  10.19 11.1 90 top
NOREF#498  -  []  52.2 39.75 0 top
NOREF#499  -  []  23.43 1.88 90 top
NOREF#500  -  []  47.37 38.16 0 top
NOREF#501  -  []  21.28 27.63 90 top
NOREF#502  -  []  12.6 21.82 90 top
NOREF#503  -  []  53.5 27.81 90 top
NOREF#504  -  []  54.3 12.11 0 top
NOREF#505  -  []  34.85 35.33 0 top
NOREF#506  -  []  8.05 15.45 0 top
NOREF#507  -  []  13.18 23.01 90 top
NOREF#508  -  []  10.19 5 90 top
NOREF#509  -  []  31.55 2.85 90 top
NOREF#510  -  []  12.95 8 90 top
NOREF#511  -  []  24.27 28.58 0 top
NOREF#512  -  []  51.43 28.46 90 top
NOREF#513  -  []  9.6 21.82 90 top
NOREF#514  -  []  7.35 36.03 0 top
NOREF#515  -  []  63.65 27.11 0 top
NOREF#516  -  []  60.7 35.01 90 top
NOREF#517  -  []  44 2.17 90 top
NOREF#518  -  []  59.5 7.9 0 top
NOREF#519  -  []  31.98 34.13 90 top
NOREF#520  -  []  7.99 36.81 90 top
NOREF#521  -  []  50.65 31.18 0 top
NOREF#522  -  []  19.15 34.01 90 top
NOREF#523  -  []  13.6 27.43 90 top
NOREF#524  -  []  29.1 20.88 90 top
NOREF#525  -  []  29.55 14.64 0 top
NOREF#526  -  []  48.77 26.28 0 top
NOREF#527  -  []  9.38 20.21 90 top
NOREF#528  -  []  55.83 14.86 90 top
NOREF#529  -  []  56.4 38 90 top
NOREF#530  -  []  8.5 25.82 0 top
NOREF#531  -  []  21.9 22.49 0 top
NOREF#532  -  []  58.54 21.13 90 top
NOREF#533  -  []  28.22 42.23 0 top
NOREF#534  -  []  51.25 14.08 90 top
NOREF#535  -  []  9.67 44.06 0 top
NOREF#536  -  []  12.95 6.2 90 top
NOREF#537  -  []  8.96 31.16 0 top
NOREF#538  -  []  33.8 15.81 0 top
NOREF#539  -  []  23.75 23.96 0 top
NOREF#540  -  []  28.1 9.61 0 top
NOREF#541  -  []  51.35 14.86 0 top
NOREF#542  -  []  7.96 34.79 90 top
NOREF#543  -  []  48.45 38.18 0 top
NOREF#544  -  []  13.09 3.2 90 top
NOREF#545  -  []  11.77 44.06 0 top
NOREF#546  -  []  39.02 2.71 0 top
NOREF#547  -  []  23.16 12.16 0 top
NOREF#548  -  []  20.27 23.88 0 top
NOREF#549  -  []  61.3 6.32 90 top
NOREF#550  -  []  35.87 43.66 0 top
NOREF#551  -  []  29.98 2.11 90 top
NOREF#552  -  []  23.43 9.38 90 top
NOREF#553  -  []  33.78 35.33 90 top
NOREF#554  -  []  61.75 17.46 0 top
NOREF#555  -  []  45 18.41 0 top
NOREF#556  -  []  11.38 20.21 90 top
NOREF#557  -  []  10.05 14.2 90 top
NOREF#558  -  []  50.23 25.83 90 top
NOREF#559  -  []  10.95 5.65 0 top
NOREF#560  -  []  25.6 18.46 90 top
NOREF#561  -  []  60.9 17.81 0 top
NOREF#562  -  []  37.1 42.23 90 top
NOREF#563  -  []  64.6 37.16 0 top
NOREF#564  -  []  5.3 24.63 90 top
NOREF#565  -  []  65.52 6.08 0 top
NOREF#566  -  []  46.64 3.05 90 top
NOREF#567  -  []  25.01 6.08 90 top
NOREF#568  -  []  25.5 20.07 0 top
NOREF#569  -  []  10.05 8 90 top
NOREF#570  -  []  21.52 16.26 0 top
NOREF#571  -  []  42.12 2.17 0 top
NOREF#572  -  []  17.27 37.81 0 top
NOREF#573  -  []  11.09 15.95 0 top
NOREF#574  -  []  29.95 35.76 90 top
NOREF#575  -  []  22.94 31.98 90 top
NOREF#576  -  []  25.04 12.16 90 top
NOREF#577  -  []  50.2 32.76 0 top
NOREF#578  -  []  40.85 35.08 0 top
NOREF#579  -  []  60.95 36.25 90 top
NOREF#580  -  []  24.55 35.76 90 top
NOREF#581  -  []  21.55 1.88 0 top
NOREF#582  -  []  56.93 23.91 90 top
NOREF#583  -  []  5.3 20.21 90 top
NOREF#584  -  []  34 0 90 top
NOREF#585  -  []  51 30.59 0 top
NOREF#586  -  []  27.63 8.46 90 top
NOREF#587  -  []  35.4 15 90 top
NOREF#588  -  []  10.95 7.45 0 top
NOREF#589  -  []  54.8 38.81 0 top
NOREF#590  -  []  23.13 11.68 0 top
NOREF#591  -  []  25.4 28.4 90 top
NOREF#592  -  []  47.1 19.32 0 top
NOREF#593  -  []  39.35 35.86 90 top
NOREF#594  -  []  44.33 15.06 90 top
NOREF#595  -  []  6.38 37.03 90 top
NOREF#596  -  []  55.05 20.51 0 top
NOREF#597  -  []  15.66 36.03 0 top
NOREF#598  -  []  25.01 13.58 90 top
NOREF#599  -  []  17.6 27.43 90 top
NOREF#600  -  []  22.28 27.63 90 top
NOREF#601  -  []  52.05 37.15 90 top
NOREF#602  -  []  22.94 32.98 90 top
NOREF#603  -  []  8.05 17.25 0 top
Q1  S8550  [SOT-23-3]  4.8 37.7 0 top
Q2  S8550  [SOT-23-3]  17.2 37.7 0 top
Q3  S8550  [SOT-23-3]  17.2 32.9 0 top
Q4  BAT54CW  [SOT-323]  49.9 20.9 270 bottom
Q5  BAT54CW  [SOT-323]  25.5 12.1 0 bottom
Q6  BAT54CW  [SOT-323]  25.5 4.6 0 bottom
R1  150K-OHMS  [R0402]  59.1 39.3 270 top
R2  47.5K-OHMS  [R0402]  59.6 36.1 90 top
R3  10K-OHMS  [R0402]  21 29.5 0 top
R4  10K-OHMS  [R0402]  28.4 30 180 top
R5  10K-OHMS  [R0402]  50 28.6 0 top
R6  10K-OHMS  [R0402]  18.9 28.1 270 top
R7  10K-OHMS  [R0402]  28.9 28.1 270 top
R8  10K-OHMS  [R0402]  31.4 27.11 90 top
R9  10-OHMS  [R0603]  63.65 26.3 0 top
R10  10K-OHMS  [R0402]  20.1 26.3 180 top
R11  1Meg-OHMS  [R0402]  47.85 26.3 270 top
R12  33.2K  [R0402]  55.5 25.05 0 top
R13  10K-OHMS  [R0402]  20.1 25.3 180 top
R14  5.49K-OHMS  [R0402]  4.2 24.1 90 top
R15  100K-OHMS  [R0402]  24.2 24.1 0 top
R16  5.62K  [R0402]  55.5 24.05 0 top
R17  2.2K-OHMS  [R0402]  21.4 22.96 270 top
R18  2.2K-OHMS  [R0402]  28 21.97 90 top
R19  6.49K  [R0402]  56.49 22.55 180 top
R20  16.2K-OHMS  [R0402]  4.2 21.3 90 top
R21  2K-OHMS  [R0402]  55.5 19.2 0 top
R22  20K-OHMS  [R0402]  58 19.2 0 top
R23  16.2K-OHMS  [R0402]  21.97 16.4 0 top
R24  0-OHMS  [R0402]  48.21 16 0 top
R25  5.62K-OHMS  [R0603]  60.9 17 270 top
R26  1.87K-OHMS  [R0402]  22.82 15.95 180 top
R27  10-OHMS  [R0603]  37.59 15 0 top
R28  100K-OHMS  [R0402]  26.5 15 0 top
R29  100K-OHMS  [R0402]  30.2 15.5 180 top
R30  DNP  [R0402]  46.6 15.5 180 top
R31  100K-OHMS  [R0402]  49.2 15.5 180 top
R32  1.62K-OHMS  [R0402]  51.8 15 0 top
R33  16.2K  [R0402]  54.4 15 0 top
R34  100K-OHMS  [R0402]  21.97 13.55 0 top
R35  0.68-OHMS  [R0805]  8.19 12.9 0 top
R36  0.68-OHMS  [R0805]  11.09 12.9 0 top
R37  100K-OHMS  [R0402]  22.96 13.1 180 top
R38  0.68-OHMS  [R0805]  8.19 11.1 0 top
R39  0.68-OHMS  [R0805]  11.09 11.1 0 top
R40  10K  [R0402]  58.6 10.59 270 top
R41  10K  [R0402]  60.2 9.6 90 top
R42  16.2K-OHMS  [R0402]  21.97 8.9 0 top
R43  1.87K-OHMS  [R0402]  22.96 8.45 180 top
R44  DNP  [R0402]  60.2 7.41 90 top
R45  23.7K-OHMS  [R0402]  62.2 7 0 top
R46  100K-OHMS  [R0402]  21.97 6.05 0 top
R47  0.68-OHMS  [R0805]  8.19 5 0 top
R48  0.68-OHMS  [R0805]  11.09 5 0 top
R49  100K-OHMS  [R0402]  22.96 5.6 180 top
R50  2K  [R0402]  45.1 5.5 270 top
R51  2K  [R0402]  48.3 5.5 270 top
R52  2K  [R0402]  55.3 5.5 270 top
R53  33.2K  [R0402]  39.8 3.8 90 top
R54  0.68-OHMS  [R0805]  8.19 3.2 0 top
R55  0.68-OHMS  [R0805]  11.09 3.2 0 top
R56  2.37K  [R0402]  40.85 3.26 90 top
R57  6.49K  [R0402]  42.9 3.26 90 top
R58  976-OHMS  [R0402]  13.7 44.2 180 bottom
R59  511-OHMS  [R0402]  11.6 44.2 180 bottom
R60  511-OHMS  [R0402]  9.5 44.2 180 bottom
R61  3.32K-OHMS  [R0402]  35.7 43.8 180 bottom
R62  3.32K-OHMS  [R0402]  30.7 43.8 180 bottom
R63  DNP  [R0402]  12.71 43.7 0 bottom
R64  3.4K-OHMS  [R0402]  10.61 43.7 0 bottom
R65  3.4K-OHMS  [R0402]  8.51 43.7 0 bottom
R66  442-OHMS  [R0402]  36 42.7 270 bottom
R67  1.1K-OHMS  [R0402]  35 42.7 270 bottom
R68  1.74K-OHMS  [R0402]  34 42.7 270 bottom
R69  4.42K-OHMS  [R0402]  33 42.7 270 bottom
R70  22.1K-OHMS  [R0402]  32 42.7 270 bottom
R71  442-OHMS  [R0402]  31 42.7 270 bottom
R72  1.1K-OHMS  [R0402]  30 42.7 270 bottom
R73  1.74K-OHMS  [R0402]  29 42.7 270 bottom
R74  4.42K-OHMS  [R0402]  28 42.7 270 bottom
R75  47.5K  [R0402]  48.9 39.6 0 bottom
R76  10K-OHMS  [R0402]  37.3 39 180 bottom
R77  2K-OHMS  [R0402]  17.1 38.95 180 bottom
R78  2K-OHMS  [R0402]  4.95 39.45 0 bottom
R79  10K-OHMS  [R0402]  27.9 38.9 180 bottom
R80  10K-OHMS  [R0402]  22.5 38.9 180 bottom
R81  10K-OHMS  [R0402]  33.5 38.8 0 bottom
R82  10K-OHMS  [R0402]  30.55 38.8 0 bottom
R83  150K-OHMS  [R0402]  48.9 38.6 0 bottom
R84  DNP  [R0402]  42.3 38 180 bottom
R85  DNP  [R0402]  37.3 38 180 bottom
R86  1K-OHMS  [R0402]  17.1 37.95 180 bottom
R87  1K-OHMS  [R0402]  4.95 38.45 0 bottom
R88  10K-OHMS  [R0402]  26.91 38.4 0 bottom
R89  10K-OHMS  [R0402]  21.51 38.4 0 bottom
R90  10K-OHMS  [R0402]  42.3 37 180 bottom
R91  10K-OHMS  [R0402]  36.31 37.5 0 bottom
R92  1.69K-OHMS  [R0402]  16.11 37.45 0 bottom
R93  1.69K-OHMS  [R0402]  5.94 36.95 180 bottom
R94  10K-OHMS  [R0402]  26.91 37.4 0 bottom
R95  10K-OHMS  [R0402]  21.51 37.4 0 bottom
R96  10K-OHMS  [R0402]  27.9 35.9 180 bottom
R97  10K-OHMS  [R0402]  22.5 35.9 180 bottom
R98  10K-OHMS  [R0402]  33.5 35.55 0 bottom
R99  10K-OHMS  [R0402]  30.55 35.55 0 bottom
R100  10K-OHMS  [R0402]  42.3 35 180 bottom
R101  10K-OHMS  [R0402]  22.5 34.9 180 bottom
R102  9.09K-OHMS  [R0402]  26.91 34.4 0 bottom
R103  10K-OHMS  [R0402]  21.51 34.4 0 bottom
R104  10K-OHMS  [R0402]  7.8 34.3 0 bottom
R105  0-OHMS  [R0402]  38.8 34.1 0 bottom
R106  DNP  [R0402]  36.31 34.1 0 bottom
R107  1.69K-OHMS  [R0402]  16.11 33.65 0 bottom
R108  10K-OHMS  [R0402]  26.91 33.4 0 bottom
R109  10K-OHMS  [R0402]  21.51 33.4 0 bottom
R110  1K-OHMS  [R0402]  17.1 32.15 180 bottom
R111  110K-OHMS  [R0402]  27.9 31.9 180 bottom
R112  10K-OHMS  [R0402]  22.5 31.9 180 bottom
R113  DNP  [R0402]  11.3 31.6 90 bottom
R114  10K-OHMS  [R0402]  10.8 32.59 270 bottom
R115  16.2K-OHMS  [R0402]  5.3 31.6 180 bottom
R116  8.25K-OHMS  [R0402]  8.79 31.3 180 bottom
R117  2K-OHMS  [R0402]  17.1 31.15 180 bottom
R118  10K-OHMS  [R0402]  39.8 29.6 90 bottom
R119  33-OHMS  [R0402]  38.4 29.6 90 bottom
R120  33-OHMS  [R0402]  37.4 29.6 90 bottom
R121  33-OHMS  [R0402]  36.4 29.6 90 bottom
R122  10K-OHMS  [R0402]  15 26.91 90 bottom
R123  10K-OHMS  [R0402]  14.5 27.9 270 bottom
R124  DNP  [R0402]  13 26.91 90 bottom
R125  10K-OHMS  [R0402]  12.5 27.9 270 bottom
R126  10K-OHMS  [R0402]  9.5 27.9 270 bottom
R127  DNP  [R0402]  8 26.91 90 bottom
R128  10K-OHMS  [R0402]  7.5 27.9 270 bottom
R129  10K-OHMS  [R0402]  6 26.91 90 bottom
R130  10K-OHMS  [R0402]  36 23.7 270 bottom
R131  10K-OHMS  [R0402]  17.5 22.29 270 bottom
R132  71.5K-OHMS  [R0402]  16 21.3 90 bottom
R133  10K-OHMS  [R0402]  15.5 22.29 270 bottom
R134  10K-OHMS  [R0402]  14.5 22.29 270 bottom
R135  8.66K-OHMS  [R0402]  13 21.3 90 bottom
R136  10K-OHMS  [R0402]  11.5 22.29 270 bottom
R137  8.66K-OHMS  [R0402]  9 21.3 90 bottom
R138  10K-OHMS  [R0402]  8.5 22.29 270 bottom
R139  71.5K-OHMS  [R0402]  7 21.3 90 bottom
R140  10K-OHMS  [R0402]  6.5 22.29 270 bottom
R141  10K-OHMS  [R0402]  34.3 20.51 90 bottom
R142  DNP  [R0402]  44.5 19.5 90 bottom
R143  0-OHMS  [R0402]  44 20.49 270 bottom
R144  1.4K-OHMS  [R0603]  61.75 16.65 270 bottom
R145  DNP  [R0402]  22 15.8 0 bottom
R146  0.68-OHMS  [R0805]  10.95 16 0 bottom
R147  0.68-OHMS  [R0805]  8.05 16 0 bottom
R148  100K-OHMS  [R0402]  22.99 14.3 180 bottom
R149  0.68-OHMS  [R0805]  10.95 14.2 0 bottom
R150  0.68-OHMS  [R0805]  8.05 14.2 0 bottom
R151  100K-OHMS  [R0402]  22 13.8 0 bottom
R152  24.9K-OHMS  [R0603]  45.9 13.9 270 bottom
R153  1.87K-OHMS  [R0402]  22.99 11.3 180 bottom
R154  5.62K-OHMS  [R0603]  48.4 11 180 bottom
R155  100K-OHMS  [R0402]  27.6 10.7 90 bottom
R156  16.2K-OHMS  [R0402]  22 10.8 0 bottom
R157  2K-OHMS  [R0603]  55.7 11.3 270 bottom
R158  825-OHMS  [R0603]  54.3 11.3 270 bottom
R159  DNP  [R0402]  22 8.3 0 bottom
R160  2K-OHMS  [R0603]  59.5 7.09 90 bottom
R161  100K-OHMS  [R0402]  52.2 8.1 0 bottom
R162  0.68-OHMS  [R0805]  10.95 8 0 bottom
R163  0.68-OHMS  [R0805]  8.05 8 0 bottom
R164  100K-OHMS  [R0402]  22.99 6.8 180 bottom
R165  100K-OHMS  [R0402]  22 6.3 0 bottom
R166  0.68-OHMS  [R0805]  10.95 6.2 0 bottom
R167  0.68-OHMS  [R0805]  8.05 6.2 0 bottom
R168  100K-OHMS  [R0402]  58.9 4.1 90 bottom
R169  1.87K-OHMS  [R0402]  22.99 3.8 180 bottom
R170  100K-OHMS  [R0402]  27.6 3.2 90 bottom
R171  24.9K-OHMS  [R0603]  58.3 4.4 270 bottom
R172  33.2K-OHMS  [R0603]  50.5 2.7 90 bottom
R173  16.2K-OHMS  [R0402]  22 3.3 0 bottom
REF  -  [unnamed#2]  34 51 0 top
U1  SGM7SZ08YXDM6G/TR  [XTDFN-1X1-6L]  30.6 38.2 180 top
U2  SGM7SZ08YXDM6G/TR  [XTDFN-1X1-6L]  33.55 38.2 180 top
U3  SGM7SZ08YXDM6G/TR  [XTDFN-1X1-6L]  44.8 38.2 180 top
U4  SGM7SZ08YXDM6G/TR  [XTDFN-1X1-6L]  47 38.2 180 top
U5  SGM2028-ADJ  [SOT-23-5]  50.6 38.1 90 top
U6  SGM2028-ADJ  [SOT-23-5]  56.9 37.7 0 top
U7  SGM2028-3.3  [SOT-23-5]  61.9 37.7 0 top
U8  SGM8968-2  [SOIC-8]  39.4 37.1 270 top
U9  SGM7SZ08YXDM6G/TR  [XTDFN-1X1-6L]  30.6 34.95 180 top
U10  SGM7SZ08YXDM6G/TR  [XTDFN-1X1-6L]  33.55 34.95 180 top
U11  SGM7SZ08YXDM6G/TR  [XTDFN-1X1-6L]  44.1 35.66 0 top
U12  SGM7SZ08YXDM6G/TR  [XTDFN-1X1-6L]  46.3 35.66 0 top
U13  SGM8968-4  [SOIC-14]  13.73 39.1 270 top
U14  SGM8968-4XS14G/TR  [SOIC-14]  22 31.5 90 top
U15  TPR33XX-S3TR  [SOT-23-3]  4.8 33.3 0 top
U16  SGM2028-3.3  [SOT-23-5]  50.6 33.3 90 top
U17  SGM58031XMS10G/TR  [MSOP-10]  22.2 25.8 90 top
U18  GD32F303RGT6  [LQFP64]  39.4 26.5 90 top
U19  SGM8968-4XS14G/TR  [SOIC-14]  7.23 27.2 0 top
U20  SGM6230  [SOIC-8-EPAD]  58.75 21.1 90 top
U21  NCE3013J  [DFN2X2-6L]  25.73 23.5 180 top
U22  SGM7SZ08YXDM6G/TR  [XTDFN-1X1-6L]  23.2 19.7 180 top
U23  SGM7SZ08YXDM6G/TR  [XTDFN-1X1-6L]  26.4 20.4 0 top
U24  AS4950  [SOP8-PP]  15 11.6 90 top
U25  NCE603S  [SOP-8]  30.1 8.7 180 top
U26  NCE40P06J  [DFN2X2-6L]  23.5 10.1 90 top
U27  NCE603S  [SOP-8]  52.1 12.95 0 top
U28  SGM6230  [SOIC-8-EPAD]  43.6 6.95 180 top
U29  AS4950  [SOP8-PP]  15 3.9 90 top
U30  SGM7SZ08YXDM6G/TR  [XTDFN-1X1-6L]  46.55 5.4 90 top
U31  SGM7SZ08YXDM6G/TR  [XTDFN-1X1-6L]  49.85 5.4 90 top
U32  SGM7SZ08YXDM6G/TR  [XTDFN-1X1-6L]  56.7 5.4 90 top
U33  NCE6003Y  [SOT-23-3L]  53.2 4.6 0 top
U34  SGM7SZ14  [SOT-23-5]  60.1 4.6 0 top
U35  NCE40P06J  [DFN2X2-6L]  23.5 2.6 90 top
U36  SGM7SZ08YXDM6G/TR  [XTDFN-1X1-6L]  63.1 39.1 180 bottom
U37  SGM7SZ08YXDM6G/TR  [XTDFN-1X1-6L]  58.1 39.1 180 bottom
U38  SGM7SZ08YXDM6G/TR  [XTDFN-1X1-6L]  60.5 36.2 0 bottom
U39  SGM7SZ08YXDM6G/TR  [XTDFN-1X1-6L]  55.5 36.2 0 bottom
U40  GD25Q40ETIG  [SOP8-150MIL]  41.2 28 180 bottom
U41  NCE60P04Y  [SOT-23-3L]  58.2 15.8 90 bottom
U42  SGM7SZ08YXDM6G/TR  [XTDFN-1X1-6L]  24.3 15.6 270 bottom
U43  AS4950  [SOP8-PP]  15 15.4 270 bottom
U44  KMB26S  [TO-269AA]  59.2 12.8 270 bottom
U45  NCE60P04Y  [SOT-23-3L]  46.8 8.8 270 bottom
U46  SGM7SZ08YXDM6G/TR  [XTDFN-1X1-6L]  24.68 7.9 270 bottom
U47  AS4950  [SOP8-PP]  15 7.7 270 bottom
U48  NCE60P04Y  [SOT-23-3L]  53.4 4.5 0 bottom
U49  SGM7SZ14  [SOT-23-5]  45.69 4.51 180 bottom
UNK*  -  [unnamed#2]  -3 14 0 top
UNK*#2  -  [unnamed#2]  44 51 0 top
UNK*#3  -  [unnamed#2]  44 -3 0 top
UNK*#4  -  [unnamed#2]  71 34 0 top
UNK*#5  -  [unnamed#2]  -3 24 0 top
UNK*#6  -  [unnamed#2]  34 -3 0 top
UNK*#7  -  [unnamed#2]  -3 34 0 top
UNK*#8  -  [unnamed#2]  24 51 0 top
UNK*#9  -  [unnamed#2]  24 -3 0 top
UNK*#10  -  [unnamed#2]  71 14 0 top
UNK*#11  -  [unnamed#2]  71 24 0 top
UNK*#12  -  [unnamed#2]  24 -3 180 bottom
UNK*#13  -  [unnamed#2]  34 51 180 bottom
UNK*#14  -  [unnamed#2]  71 24 180 bottom
UNK*#15  -  [unnamed#2]  71 14 180 bottom
UNK*#16  -  [unnamed#2]  44 -3 180 bottom
UNK*#17  -  [unnamed#2]  24 51 180 bottom
UNK*#18  -  [unnamed#2]  44 51 180 bottom
UNK*#19  -  [unnamed#2]  34 -3 180 bottom
UNK*#20  -  [unnamed#2]  -3 14 180 bottom
UNK*#21  -  [unnamed#2]  -3 34 180 bottom
UNK*#22  -  [unnamed#2]  -3 24 180 bottom
UNK*#23  -  [unnamed#2]  71 34 180 bottom
Y1  8MHz  [CRY-SMD-3D2X2D5MM-4P]  50.3 24.7 90 top
Y2  32.768KHz  [CRY-SMD-3D2X1D5MM-2P]  50.8 22.1 270 top

## Library data of the parts
BT1 = BATTERY
C1-C106 = CAP NP
D1 D47 = DIODE TVS_0
D2 D3 D7-D9 = LED
D4 D10-D32 D34 D42 D43 = DIODE TS BI-DIR
D5 D33 D35-D41 D44 D45 = DIODE ZENER_0
D6 D46 = DIODE
F1 = FUSE
J1 = Header1x6_0
J2 = Header1x14
J3 = Header1x16_0
J4 = Header1x8
J5 = Header1x4_0
J6 = Header1x5
L1 L3-L6 = INDUCTOR
L2 = BEAD
Q1-Q3 = 2N2800_1
Q4-Q6 = BAT54CW_0
R1-R173 = R
U1-U4 U9-U12 U22 U23 U30-U32 U36-U39 U42 U46 = SGM7SZ08YXDM6G/TR_0
U5-U7 U16 = SGM2028
U8 = SGM8968-2
U13 U14 U19 = SGM8968-4
U15 = TPR33XX-S3TR
U17 = SGM58031
U18 = GD32F303RE
U20 U28 = SGM6230
U21 = NCE3013J
U24 U29 U43 U47 = AS4950
U25 = NCE603S
U26 U35 = NCE40P06J
U27 = NCE603S_3
U33 = NCE6003Y
U34 U49 = SGM7SZ14_0
U40 = GD25Q40E
U41 U45 U48 = NCE60P04Y
U44 = KMB26S
Y1 = CRYSTAL_1
Y2 = CRYSTAL

## Footprints (pads in the part's own frame, mm; a bottom-side part is the same pattern mirrored in y, then rotated)
C0402
  rect 0.6x0.5 smd: 1(0.01,0.25) 2(0.97,0.25)
C0603
  rect 0.4x0.8 smd: 1(0.1,0.4) 2(1.5,0.4)
C0805
  rect 0.7x1 smd: 1(0.2,0.62) 2(1.8,0.62)
C2220
  rect 1x5 smd: 1(0,0) 2(5.2,0)
CRY-SMD-3D2X1D5MM-2P
  rect 1.1x1.9 smd: 1(0,0) 2(2.5,0)
CRY-SMD-3D2X2D5MM-4P
  rect 1.3x1.1 smd: 1(0,-1.8) 2(2.3,-1.8) 3(2.3,0) 4(0,0)
DFN2X2-6L
  rect 0.326x0.35 smd: 1(0.17,1.67) 2(0.17,1.02) 3(0.17,0.37) 4(1.91,0.37) 5(1.91,1.02) 6(1.91,1.67)
  rect 0.8x0.85 smd: D(1.04,1.44)
  rect 0.66x0.35 smd: S(1.04,0.37)
DFN-1006DN
  rect 0.2x0.5 smd: 1(0,0) 2(0.65,0)
DO-214AC
  rect 1.8x2.1 smd: 1(0.13,1.4) 2(4.53,1.4)
FB0402
  rect 0.5x0.5 smd: 1(0.05,0.24) 2(0.95,0.24)
FUSE1206
  rect 0.8x1.8 smd: 1(0,0) 2(2.5,0)
IND-5D7X5D2X1D8
  rect 2x3 smd: 1(0,0) 2(4.2,0)
L0805
  rect 0.7x1 smd: 1(0.2,0.62) 2(1.8,0.62)
LED0402
  rect 0.4x0.6 smd: 1(-0.1,0.25) 2(1.1,0.25)
LQFP64
  rect 0.2x0.75 smd: 1(-3.75,-5.6) 2(-3.25,-5.6) 3(-2.75,-5.6) 4(-2.25,-5.6) 5(-1.75,-5.6) 6(-1.25,-5.6) 7(-0.75,-5.6) 8(-0.25,-5.6) 9(0.25,-5.6) 10(0.75,-5.6) 11(1.25,-5.6) 12(1.75,-5.6) 13(2.25,-5.6) 14(2.75,-5.6) 15(3.25,-5.6) 16(3.75,-5.6) 33(3.75,5.6) 34(3.25,5.6) 35(2.75,5.6) 36(2.25,5.6) 37(1.75,5.6) 38(1.25,5.6) 39(0.75,5.6) 40(0.25,5.6) 41(-0.25,5.6) 42(-0.75,5.6) 43(-1.25,5.6) 44(-1.75,5.6) 45(-2.25,5.6) 46(-2.75,5.6) 47(-3.25,5.6) 48(-3.75,5.6)
  rect 0.75x0.2 smd: 17(5.6,-3.75) 18(5.6,-3.25) 19(5.6,-2.75) 20(5.6,-2.25) 21(5.6,-1.75) 22(5.6,-1.25) 23(5.6,-0.75) 24(5.6,-0.25) 25(5.6,0.25) 26(5.6,0.75) 27(5.6,1.25) 28(5.6,1.75) 29(5.6,2.25) 30(5.6,2.75) 31(5.6,3.25) 32(5.6,3.75) 49(-5.6,3.75) 50(-5.6,3.25) 51(-5.6,2.75) 52(-5.6,2.25) 53(-5.6,1.75) 54(-5.6,1.25) 55(-5.6,0.75) 56(-5.6,0.25) 57(-5.6,-0.25) 58(-5.6,-0.75) 59(-5.6,-1.25) 60(-5.6,-1.75) 61(-5.6,-2.25) 62(-5.6,-2.75) 63(-5.6,-3.25) 64(-5.6,-3.75)
MSOP-10
  rect 0.3x1 smd: 1(0,-5) 2(0.5,-5) 3(1,-5) 4(1.5,-5) 5(2,-5) 6(2,0) 7(1.5,0) 8(1,0) 9(0.5,0) 10(0,0)
R0402
  rect 0.6x0.5 smd: 1(0.01,0.25) 2(0.97,0.25)
R0603
  rect 0.4x0.8 smd: 1(0.1,0.4) 2(1.5,0.4)
R0805
  rect 0.7x1 smd: 1(0.2,0.62) 2(1.8,0.62)
SMD-SH1D0-4P-HOR
  rect 0.5x1.2 smd: 1(-1.5,0.74) 2(-0.5,0.74) 3(0.5,0.74) 4(1.5,0.74)
  rect 0.8x1.8 smd: 5(2.8,-3.3) 6(-2.8,-3.3)
SMD-SH1D0-5P-HOR
  rect 0.5x1.2 smd: 1(-2.5,0.7) 2(-1.5,0.7) 3(-0.5,0.7) 4(0.5,0.7) 5(1.5,0.7)
  rect 0.8x1.8 smd: 6(2.8,-3.3) 7(-3.8,-3.3)
SMD-SH1D0-6P-HOR
  rect 0.5x1.2 smd: 1(-2.5,0.7) 2(-1.5,0.7) 3(-0.5,0.7) 4(0.5,0.7) 5(1.5,0.7) 6(2.5,0.7)
  rect 0.8x1.8 smd: 7(3.8,-3.3) 8(-3.8,-3.3)
SMD-SH1D0-8P-HOR
  rect 0.5x1.2 smd: 1(-3.5,0.7) 2(-2.5,0.7) 3(-1.5,0.7) 4(-0.5,0.7) 5(0.5,0.7) 6(1.5,0.7) 7(2.5,0.7) 8(3.5,0.7)
  rect 0.8x1.8 smd: 9(4.8,-3.3) 10(-4.8,-3.3)
SMD-SH1D0-14P-HOR
  rect 0.5x1.2 smd: 1(-7.5,0.7) 2(-6.5,0.7) 3(-5.5,0.7) 4(-4.5,0.7) 5(-3.5,0.7) 6(-2.5,0.7) 7(-1.5,0.7) 8(-0.5,0.7) 9(0.5,0.7) 10(1.5,0.7) 11(2.5,0.7) 12(3.5,0.7) 13(4.5,0.7) 14(5.5,0.7)
  rect 0.8x1.8 smd: 15(6.9,-3.3) 16(-8.8,-3.3)
SMD-SH1D0-16P-HOR
  rect 0.5x1.2 smd: 1(-7.5,0.7) 2(-6.5,0.7) 3(-5.5,0.7) 4(-4.5,0.7) 5(-3.5,0.7) 6(-2.5,0.7) 7(-1.5,0.7) 8(-0.5,0.7) 9(0.5,0.7) 10(1.5,0.7) 11(2.5,0.7) 12(3.5,0.7) 13(4.5,0.7) 14(5.5,0.7) 15(6.5,0.7) 16(7.5,0.7)
  rect 0.8x1.8 smd: 17(8.8,-3.3) 18(-8.8,-3.3)
SOD-123
  rect 0.6x0.5 smd: 1(0,0) 2(3.1,0)
SOD-323
  rect 0.6x0.4 smd: 1(0.235,0.673) 2(2.635,0.673)
SOIC-8
  rect 0.5x1 smd: 1(-1.89,-2.56) 2(-0.62,-2.56) 3(0.65,-2.56) 4(1.92,-2.56) 5(1.92,2.54) 6(0.65,2.54) 7(-0.62,2.54) 8(-1.89,2.54)
SOIC-8-EPAD
  rect 0.61x1.91 smd: 1(0,-5.6) 2(1.27,-5.6) 3(2.54,-5.6) 4(3.81,-5.6) 5(3.81,0) 6(2.54,0) 7(1.27,0) 8(0,0)
  rect 3x2 smd: 9(1.85,-2.8)
SOIC-14
  rect 0.6x2.2 smd: 1(0,-5.4) 2(1.27,-5.4) 3(2.54,-5.4) 4(3.81,-5.4) 5(5.08,-5.4) 6(6.35,-5.4) 7(7.62,-5.4) 8(7.62,0) 9(6.35,0) 10(5.08,0) 11(3.81,0) 12(2.54,0) 13(1.27,0) 14(0,0)
SOP8-150MIL
  rect 0.5x0.9 smd: 1(0,-5.3) 2(1.27,-5.3) 3(2.54,-5.3) 4(3.81,-5.3) 5(3.81,0.3) 6(2.54,0.3) 7(1.27,0.3) 8(0,0.3)
SOP8-PP
  rect 0.45x1.2 smd: 1(0,-5) 2(1.27,-5) 3(2.54,-5) 4(3.81,-5) 5(3.81,0) 6(2.54,0) 7(1.27,0) 8(0,0)
  rect 3x2 smd: 9(1.9,-2.5)
SOP-8
  rect 0.45x1.2 smd: 1(0,-5) 2(1.27,-5) 3(2.54,-5) 4(3.81,-5) 5(3.81,0) 6(2.54,0) 7(1.27,0) 8(0,0)
SOT-23-3
  rect 0.8x0.8 smd: 1(-0.95,-1.4) 2(0.95,-1.4) 3(0,1.4)
SOT-23-3L
  rect 0.8x0.8 smd: 1(-0.95,-1.4) 2(0.95,-1.4) 3(0,1.4)
SOT-23-5
  rect 0.5x0.8 smd: 1(-0.95,-1.45) 2(0,-1.45) 3(0.95,-1.45) 4(0.96,1.45) 5(-0.94,1.45)
SOT-323
  rect 0.5x0.6 smd: 1(-0.65,-0.95) 2(0.65,-0.95) 3(0,0.95)
TO-269AA
  rect 0.8x1 smd: 1(0,-6.6) 2(2.4,-6.6) 3(2.4,0) 4(0,0)
unnamed#2
  round 1.5 smd: (0,0)
unnamed#3
  round 3 hole 2.5 unplated: (0,0)
XTDFN-1X1-6L
  rect 0.2x0.53 smd: 1(0,-0.75) 2(0.35,-0.75) 3(0.7,-0.75) 4(0.7,0) 5(0.35,0) 6(0,0)

## Nets
12V_PWR_ON: R24.2 U18.57
GND: BT1.2(-) C1.1 C2.1 C3.2 C4.2 C5.1 C6.1 C7.2 C8.2 C9.1 C10.1 C11.1 C12.1 C13.1 C14.1 C15.1 C16.1 C17.2 C19.2 C21.2 C22.1 C23.1 C24.2 C25.2 C26.2 C27.1 C28.2 C29.2 C31.1 C32.1 C33.1 C34.1 C35.1 C36.1 C37.1 C38.1 C39.1 C40.2 C41.2 C42.2 C44.2 C45.2 C46.2 C47.2 C48.1 C49.1 C50.1 C51.1 C52.2 C53.1 C54.1 C55.1 C56.2 C57.2 C58.2 C59.1 C60.1 C61.1 C62.1 C63.2 C64.1 C65.1 C66.1 C67.1 C68.1 C69.1 C70.1 C71.1 C72.1 C73.1 C74.1 C75.1 C76.1 C77.1 C78.1 C79.1 C80.1 C81.1 C82.1 C83.1 C84.1 C85.2 C86.1 C87.1 C88.1 C89.1 C90.1 C91.2 C92.1 C93.1 C94.1 C95.1 C96.2 C97.1 C98.1 C99.1 C100.1 C101.1 C102.1 C103.2 C104.2 C105.1 C106.1 D1.2 D4.1 D5.2 D7.1(CATHODE) D8.1(CATHODE) D9.1(CATHODE) D10.2 D11.2 D12.2 D13.2 D14.2 D15.2 D16.1 D17.1 D18.1 D19.1 D20.1 D21.1 D22.1 D23.1 D24.1 D25.1 D26.1 D27.1 D28.1 D29.1 D30.1 D31.1 D32.1 D33.2 D34.1 D35.2 D36.2 D37.2 D38.2 D40.2 D41.2 D42.1 D43.1 D44.2 D47.2 J1.7 J1.8 J2.14 J2.15 J2.16 J3.2 J3.4 J3.9 J3.17 J3.18 J4.9 J4.10 J5.5 J5.6 J6.1 J6.2 J6.6 J6.7 R2.1 R14.2 R15.1 R16.1 R19.1 R21.1 R26.1 R29.1 R31.1 R32.1 R34.2 R35.1 R37.1 R38.1 R43.1 R44.2 R46.2 R47.1 R49.1 R54.1 R56.1 R57.2 R58.2 R59.2 R60.2 R75.1 R84.2 R85.2 R96.2 R97.2 R101.2 R106.1 R108.1 R113.1 R116.1 R124.2 R127.2 R133.2 R138.2 R143.1 R147.1 R148.1 R150.1 R151.2 R153.1 R155.2 R161.1 R163.1 R164.1 R165.2 R167.1 R168.1 R169.1 R170.2 R171.1 U1.3 U2.3 U3.3 U4.3 U5.2 U6.2 U7.2 U8.4 U9.3 U10.3 U11.3 U12.3 U13.11 U14.11 U15.3 U16.2 U17.1 U17.3 U18.12 U18.18(VSS_4) U18.31 U18.47 U18.63 U19.11 U20.4 U20.9 U21.4 U21.S(S#S) U22.3 U23.3 U24.1 U24.9 U25.1 U26.1 U26.2 U26.5 U26.6 U26.D U27.1 U28.4 U28.9 U29.1 U29.9 U30.3 U31.3 U32.3 U33.2(S) U34.3 U35.1 U35.2 U35.5 U35.6 U35.D U36.3 U37.3 U38.3 U39.3 U40.4 U42.3 U43.1 U43.9 U44.4 U46.3 U47.1 U47.9 U49.3 Y1.2 Y1.4
VBAT: D46.2 F1.2 R154.2 R157.2 R158.2 U27.3(S2) U45.2(S) U48.2(S)
VBAT_IN: J5.3 J5.4 U44.1
VBAT_PRE: D45.1(CATHODE) F1.1 R160.2 U41.2(S) U44.3
VBAT_RTN: J5.1 J5.2 U44.2
VDD5: C59.2 C67.2 C68.2 C69.2 C73.2 C74.2 C79.2 C80.2 C91.1 R83.1 R92.1 R93.1 R107.1 R115.2 U5.5(OUT) U13.4 U14.4 U15.1 U19.4
VDD5_DISP: C1.2 J3.3 R1.1 U6.5(OUT)
VDD12: C40.1 C41.1 C42.1 C101.2 D47.1(CATHODE) L3.2 L4.1 L5.1 L6.1 R53.1
VDD12_FAN: C100.2 C106.2 L6.2 U43.5 U47.5
VDD12_LDM: J6.3 U25.5 U25.6
VDD12_MOTOR: C31.2 C32.2 C36.2 C37.2 L5.2 R20.1 U24.5 U29.5
VDD33: C3.1 C4.1 C7.1 C8.1 C13.2 C23.2 C24.1 C52.1 C56.1 C57.1 C58.1 C64.2 C71.2 C72.2 C83.2 C85.1 C88.2 C96.1 C98.2 C102.2 J3.10 L2.1 Q4.1 R5.2 R8.2 R10.2 R13.2 R17.2 R18.2 R23.2 R42.2 R61.1 R62.1 R81.2 R82.2 R98.2 R99.2 R105.2 R118.2 R130.2 R141.2 R142.2 R156.2 R173.2 U1.1 U1.6 U2.1 U2.6 U3.1 U3.6 U4.1 U4.6 U8.8 U9.1 U9.6 U10.1 U10.6 U11.1 U11.6 U12.1 U12.6 U16.5(OUT) U17.8(VDD) U18.19 U18.32 U18.48 U18.64 U22.1 U22.6 U23.1 U23.6 U37.1 U37.6 U39.1 U39.6 U40.3(WP#(IO2)) U40.7 U40.8 U42.6 U46.6
VDD33_WIFI: C2.2 C55.2 C63.1 J3.1 U7.5(OUT) U36.1 U36.6 U38.1 U38.6
VDD33A: C9.2 C10.2 L2.2 U18.13
VDD55: C5.2 C53.2 C54.2 C62.2 C70.2 C76.2 C82.2 C84.2 C89.2 D1.1(CATHODE) L1.2 R12.1 U5.1 U5.3 U6.1 U7.1 U16.1 U16.3
ADC01_IN14: R90.2 U8.7(OUTB) U18.24
ADC01_IN15: R76.2 U8.1 U18.25
ADC012_IN10: C86.2 R122.1 U18.11
ADC012_IN11: C87.2 R129.1 U18.10
ADC012_IN12: C95.2 R140.1 U18.9
ADC012_IN13: C92.2 R131.1 U18.8
ADC-PT100: R4.1 R111.2 U14.1
ADC-TEST: R6.1 R114.2 U13.7
ADC-VR1: R3.1 R112.2 U14.14(OUTD)
ADC-VR2: R7.1 R80.2 U14.8
ADC_RDY: R8.1 U17.2 U18.44
BOOT0: R142.1 R143.2 U18.60
BOOT1: R105.1 R106.2 U18.28
DAC_OUT0: R145.2 U18.20
DAC_OUT1: R159.2 U18.21
I2C0_SCL: R13.1 U17.10 U18.61
I2C0_SDA: R10.1 U17.9 U18.62
IO_CON_FLASH: J2.1 R66.2
IO_DAY_NIGHT: J2.2 R67.2
IO_FAN1_OUT1: J4.4 U43.6
IO_FAN1_OUT2: J4.3 U43.8
IO_FAN2_OUT1: J4.6 U47.6
IO_FAN2_OUT2: J4.5 U47.8
IO_FL_ADD: J2.3 R68.2
IO_FL_SUB: J2.4 R69.2
IO_M1_LSW_MAX: C49.2 D13.1 J2.11 R98.1 U10.2
IO_M1_LSW_MIN: C48.2 D12.1 J2.10 R81.1 U2.2
IO_M1_OUT1: J4.1 U24.6
IO_M1_OUT2: J4.2 U24.8
IO_M2_LSW_MAX: C51.2 D15.1 J2.13 R99.1 U9.2
IO_M2_LSW_MIN: C50.2 D14.1 J2.12 R82.1 U1.2
IO_M2_OUT1: J4.7 U29.6
IO_M2_OUT2: J4.8 U29.8
IO_RESERVE1: J2.5 R70.2
IO_RESERVE2: J2.9 R74.2
IO_SET: J2.8 R73.2
IO_SHOT_SW1: J2.6 R71.2
IO_SHOT_SW2: J2.7 R72.2
IO_UART3_RX: D17.2 J3.6 U38.2
IO_UART3_TX: D16.2 J3.5 U36.4(Y)
